# EAGLE board VF_GS_PANEL (EAGLE 9.6.2)
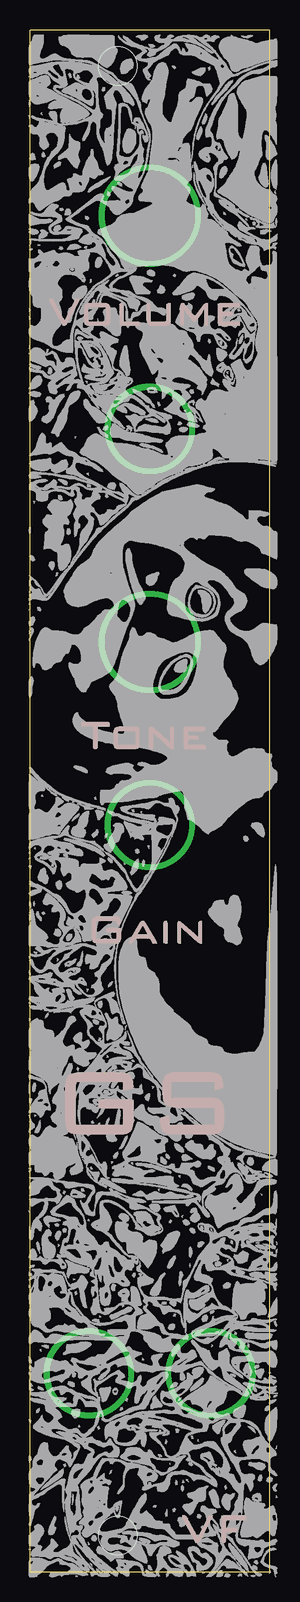
[diagram p0: board, top side]

Size 20 x 128.5 mm. Coordinates in mm from the lower left corner, seen from the top.
Copper layers (1*16): Top 0.035mm / dielectric 1.5mm / Bottom 0.035mm
Design rules "default": minimum track width 6mil, minimum drill 0.35mm, track to track 6mil, track to pad 6mil, pad to pad 6mil, via to via 6mil, smd to smd 6mil, copper to edge 40mil, drill to drill 6mil, minimum pad ring 10mil, minimum via ring 8mil, stop-mask expansion 4mil, vias tented up to drill 0mil, thermal gap 10mil
Net classes: 1 power: width 0.61 mm

## Footprints (pad centres in the part's own frame; a part is rotated, then mirrored left to right if it is on the bottom)
EURO_PANEL_4HP = hole 3.2: 7.5,125.5; 7.5,3

## Placement (x,y rotation side)
U$3  [EURO_PANEL_4HP]  -0.16,0 0 top

## Library data of the parts
U$3 = eurohelper

## Tracks (layer width: path | path; a pad name or v marks a point on that pad's centre or on a via)
GND
  pour Top (rank 3): 4.18,106.08 3.98,106.08 3.81,106.05 2.91,104.28 2.82,104.41 1.98,105.99 1.83,106.08 1.64,106.08 1.59,105.99 2.73,103.9 2.93,103.89 3.08,103.97
  pour Top (rank 3): 6.69,104.45 6.69,105.25 6.67,105.45 6.57,105.62 6.39,105.68 6.33,105.41 6.35,105.24 6.35,104.24 6.35,104.16 4.94,104.16 4.85,104.28 4.85,105.28 4.92,105.42 6.31,105.42 6.37,105.68 6.18,105.69 4.97,105.69 4.77,105.67 4.59,105.59 4.52,105.4 4.51,105.2 4.51,104.39 4.52,104.19 4.58,104 4.76,103.91 4.96,103.89 6.17,103.89 6.37,103.9 6.56,103.95 6.67,104.12 6.69,104.32
  pour Top (rank 3): 9.21,103.89 9.21,104.1 9.07,104.16 7.86,104.16 7.81,104.31 7.81,105.52 7.77,105.69 7.57,105.69 7.47,105.59 7.47,103.97 7.59,103.89
  pour Top (rank 3): 11.73,104.32 11.73,105.51 11.71,105.69 11.51,105.69 11.39,105.61 11.39,104.22 11.24,104.16 10.25,104.16 10.08,104.19 10.08,105.58 9.98,105.69 9.78,105.69 9.74,105.54 9.74,104.34 9.75,104.14 9.84,103.97 10.03,103.9 10.22,103.89 11.22,103.89 11.42,103.9 11.61,103.96 11.71,104.12
  pour Top (rank 3): 14.87,103.89 14.87,105.69 14.67,105.69 14.51,105.62 13.82,104.64 13.7,104.57 12.85,105.68 12.66,105.69 12.56,105.58 12.56,103.99 12.67,103.89 12.84,103.92 12.84,105.12 12.84,105.32 12.9,105.2 13.01,105.04 13.62,104.25 13.78,104.19 14.38,104.99 14.49,105.15 14.57,105.33 14.56,105.18 14.56,103.98 14.67,103.89
  pour Top (rank 3): 17.53,103.89 17.53,104.09 17.4,104.16 16.2,104.16 16.04,104.2 16.04,104.6 16.15,104.69 16.75,104.69 16.93,104.71 16.93,104.91 16.78,104.96 16.19,104.96 16.04,105.02 16.04,105.42 16.24,105.42 17.43,105.42 17.51,105.54 17.46,105.69 15.87,105.69 15.71,105.65 15.71,104.06 15.74,103.89
  pour Top (rank 3): 6.65,70.48 6.65,70.68 6.55,70.78 4.38,70.78 4.28,70.67 4.29,70.48 5.28,70.48 5.28,68.7 5.37,68.59 5.57,68.59 5.65,68.72 5.65,70.3 5.66,70.48
  pour Top (rank 3): 9.16,69.15 9.16,69.95 9.15,70.15 9.05,70.32 8.87,70.38 8.8,70.11 8.83,69.95 8.83,68.94 8.83,68.87 7.42,68.87 7.33,68.98 7.33,69.99 7.39,70.12 8.79,70.12 8.84,70.38 8.65,70.39 7.45,70.39 7.25,70.37 7.07,70.29 7,70.1 6.99,69.9 6.99,69.09 7,68.89 7.06,68.7 7.23,68.61 7.43,68.59 8.64,68.59 8.84,68.6 9.04,68.65 9.14,68.82 9.16,69.02
  pour Top (rank 3): 12.02,68.59 12.02,70.39 11.82,70.39 11.71,70.3 11.71,69.31 11.72,69.11 11.7,69.02 11.57,69.17 11.42,69.31 10.23,70.37 10.04,70.39 9.95,70.28 9.95,68.68 10.06,68.59 10.26,68.59 10.26,68.79 10.26,69.59 10.26,69.79 10.24,69.99 10.47,69.76 11.67,68.7 11.82,68.59
  pour Top (rank 3): 14.68,68.59 14.68,68.79 14.54,68.86 13.34,68.86 13.19,68.9 13.19,69.3 13.29,69.39 13.89,69.39 14.07,69.41 14.07,69.61 13.93,69.66 13.33,69.66 13.19,69.72 13.19,70.12 13.38,70.12 14.58,70.12 14.66,70.24 14.61,70.39 13.01,70.39 12.85,70.35 12.85,68.76 12.88,68.59
  pour Top (rank 3): 7.6,52.9 7.6,53.49 7.51,53.6 6.52,53.6 6.35,53.57 6.35,53.37 6.51,53.32 7.1,53.32 7.24,53.26 7.24,52.86 7.22,52.68 5.63,52.68 5.53,52.79 5.53,54.18 5.64,54.27 7.23,54.27 7.24,54.08 7.3,53.96 7.5,54 7.6,54.11 7.57,54.31 7.47,54.48 7.29,54.55 7.09,54.56 5.7,54.56 5.5,54.55 5.31,54.49 5.2,54.33 5.17,54.14 5.16,53.94 5.16,52.94 5.17,52.74 5.22,52.55 5.37,52.42 5.56,52.38 5.76,52.38 6.96,52.38 7.16,52.38 7.35,52.41 7.52,52.51 7.59,52.7
  pour Top (rank 3): 10.56,52.48 9.63,54.04 9.51,54.17 9.31,54.17 9.17,54.05 8.27,52.48 8.29,52.38 8.49,52.38 8.61,52.51 8.71,52.68 8.84,52.8 9.84,52.8 9.86,53.06 9.06,53.06 8.94,53.11 9.33,53.81 9.43,53.84 9.83,53.13 9.86,53.07 9.86,52.8 10.03,52.76 10.23,52.41 10.41,52.38 10.61,52.38
  pour Top (rank 3): 11.48,52.38 11.48,54 11.45,54.17 11.24,54.17 11.14,54.07 11.14,52.45 11.28,52.38
  pour Top (rank 3): 14.37,52.38 14.37,54.17 14.17,54.17 14.06,54.09 14.06,53.09 14.07,52.89 14.05,52.81 13.92,52.96 13.77,53.09 12.58,54.15 12.39,54.17 12.3,54.07 12.3,52.47 12.41,52.38 12.61,52.38 12.61,52.58 12.61,53.37 12.61,53.57 12.59,53.77 12.82,53.55 14.02,52.49 14.18,52.38
  pour Top (rank 3): 8.64,37.67 8.64,39.27 8.48,39.32 5.88,39.32 5.72,39.27 5.72,38.67 5.92,38.67 7.72,38.67 7.79,38.53 7.79,37.33 7.75,37.17 3.94,37.17 3.8,37.23 3.8,40.84 3.96,40.87 7.77,40.87 7.79,40.69 7.79,40.29 7.82,40.12 8.61,40.28 8.63,40.45 8.62,40.65 8.59,40.85 8.54,41.04 8.45,41.22 8.32,41.37 8.14,41.46 7.95,41.52 7.75,41.55 7.55,41.56 7.35,41.56 4.14,41.56 3.94,41.55 3.74,41.53 3.55,41.49 3.36,41.42 3.2,41.31 3.08,41.14 3.01,40.96 2.97,40.76 2.95,40.56 2.95,40.36 2.95,37.76 2.95,37.56 2.96,37.36 2.99,37.16 3.04,36.97 3.13,36.79 3.27,36.65 3.45,36.56 3.64,36.51 3.84,36.48 4.04,36.46 4.24,36.46 7.45,36.46 7.65,36.47 7.85,36.49 8.04,36.53 8.23,36.6 8.39,36.72 8.5,36.88 8.57,37.07 8.61,37.27 8.63,37.47
  pour Top (rank 3): 16.22,37.67 16.22,38.27 16.21,38.47 16.19,38.67 16.15,38.86 16.07,39.05 15.95,39.21 15.79,39.32 15.6,39.38 15.4,39.42 15.21,39.44 15.01,39.45 12.01,39.45 11.82,39.46 11.82,40.86 12.01,40.87 15.41,40.87 15.43,40.69 15.43,40.29 15.47,40.14 16.04,40.3 16.16,40.41 16.15,40.61 16.12,40.81 16.08,41.01 16,41.19 15.87,41.34 15.7,41.44 15.51,41.51 15.31,41.54 15.11,41.56 14.91,41.56 12.31,41.56 12.11,41.56 11.92,41.54 11.72,41.51 11.53,41.45 11.36,41.35 11.23,41.2 11.14,41.02 11.1,40.82 11.07,40.62 11.06,40.42 11.06,40.22 11.07,40.02 11.07,39.82 11.09,39.62 11.11,39.43 11.15,39.23 11.23,39.05 11.38,38.91 11.55,38.82 11.74,38.76 11.94,38.72 12.14,38.71 12.34,38.71 15.33,38.71 15.45,38.62 15.45,37.22 15.29,37.17 11.7,37.17 11.65,37.33 11.65,37.93 11.52,37.96 10.94,37.82 10.87,37.68 10.87,37.48 10.89,37.28 10.93,37.09 10.99,36.9 11.1,36.73 11.26,36.61 11.45,36.54 11.64,36.49 11.84,36.47 12.04,36.46 15.04,36.46 15.24,36.47 15.44,36.49 15.63,36.53 15.82,36.6 15.98,36.72 16.09,36.89 16.15,37.07 16.19,37.27 16.21,37.47
  pour Top (rank 3): 15.28,4.63 15.09,4.63 14.91,4.6 14.01,2.83 13.92,2.97 13.08,4.54 12.94,4.63 12.74,4.63 12.69,4.54 13.83,2.45 14.03,2.44 14.18,2.52
  pour Top (rank 3): 18.07,4.33 18.07,4.53 17.96,4.63 16.15,4.63 15.99,4.59 15.99,2.57 16.06,2.44 16.27,2.44 16.35,2.56 16.35,3.17 16.39,3.33 17.2,3.33 17.33,3.4 17.33,3.6 17.15,3.62 16.54,3.62 16.35,3.63 16.35,4.23 16.45,4.33
N$1  (via drill 6.5)
  other vias: 10,95.25
N$6  (via drill 7.5)
  other vias: 10,113.03
N$7  (via drill 7.5)
  other vias: 10,77.47
N$8  (via drill 6.5)
  other vias: 10,62.23
N$9  (via drill 6.5)
  other vias: 15.08,16.51
N$10  (via drill 6.5)
  other vias: 4.92,16.51